# Altium PCB PCB.PcbDoc
Units mil, origin at the board's own origin, x right, y up, seen from the top; angles counter-clockwise.
Board outline 2000 x 2000 mil, 2 copper layers (Top Layer, Bottom Layer); 23 components, 16 nets, 105 pads, 0 vias.
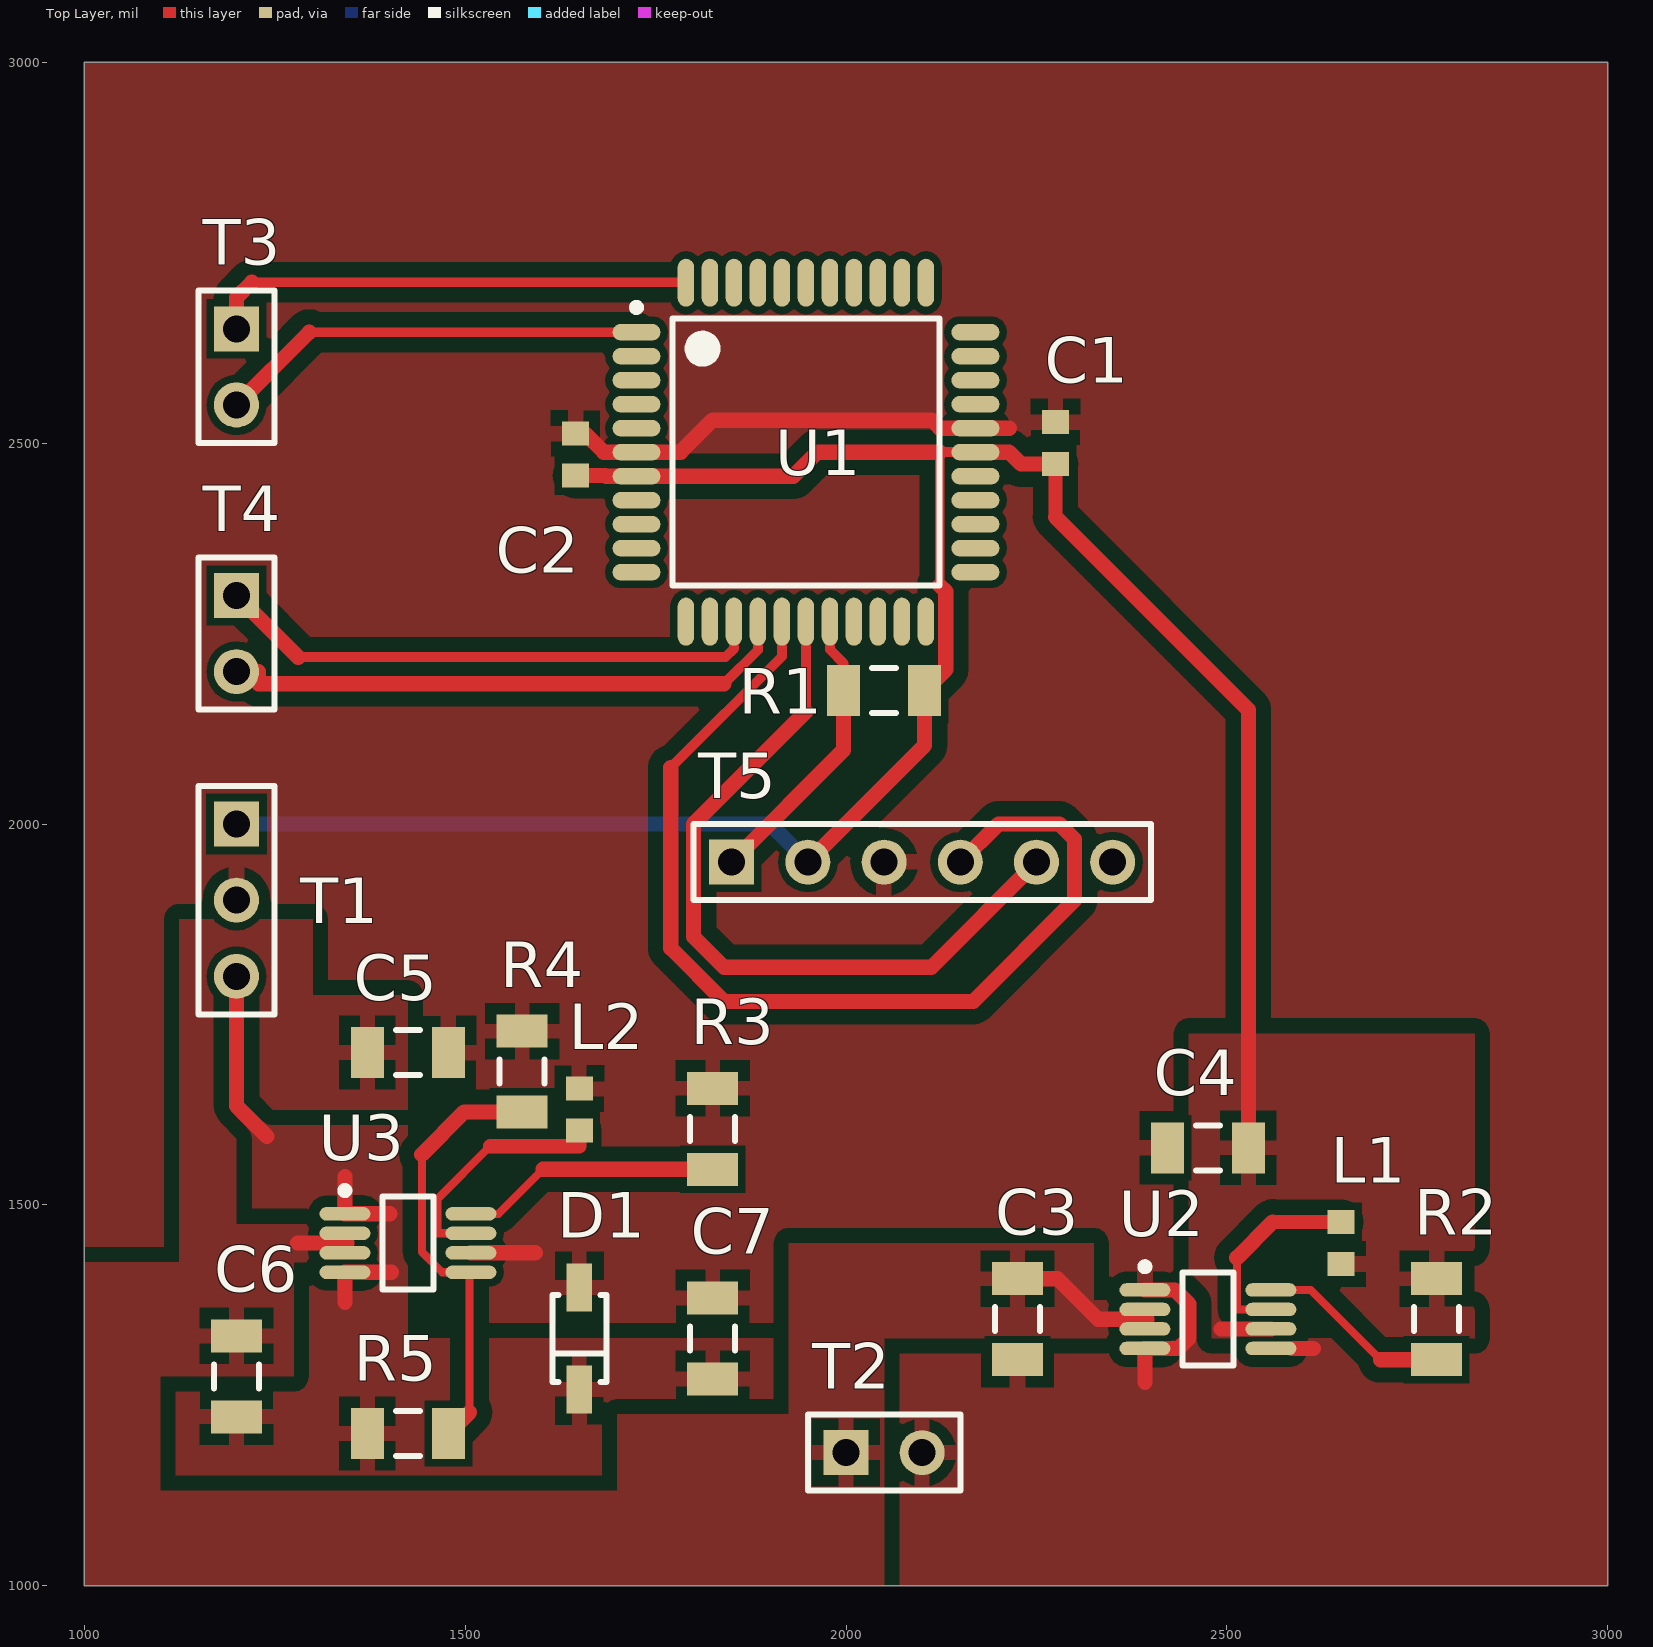
[diagram p0: Top Layer view]
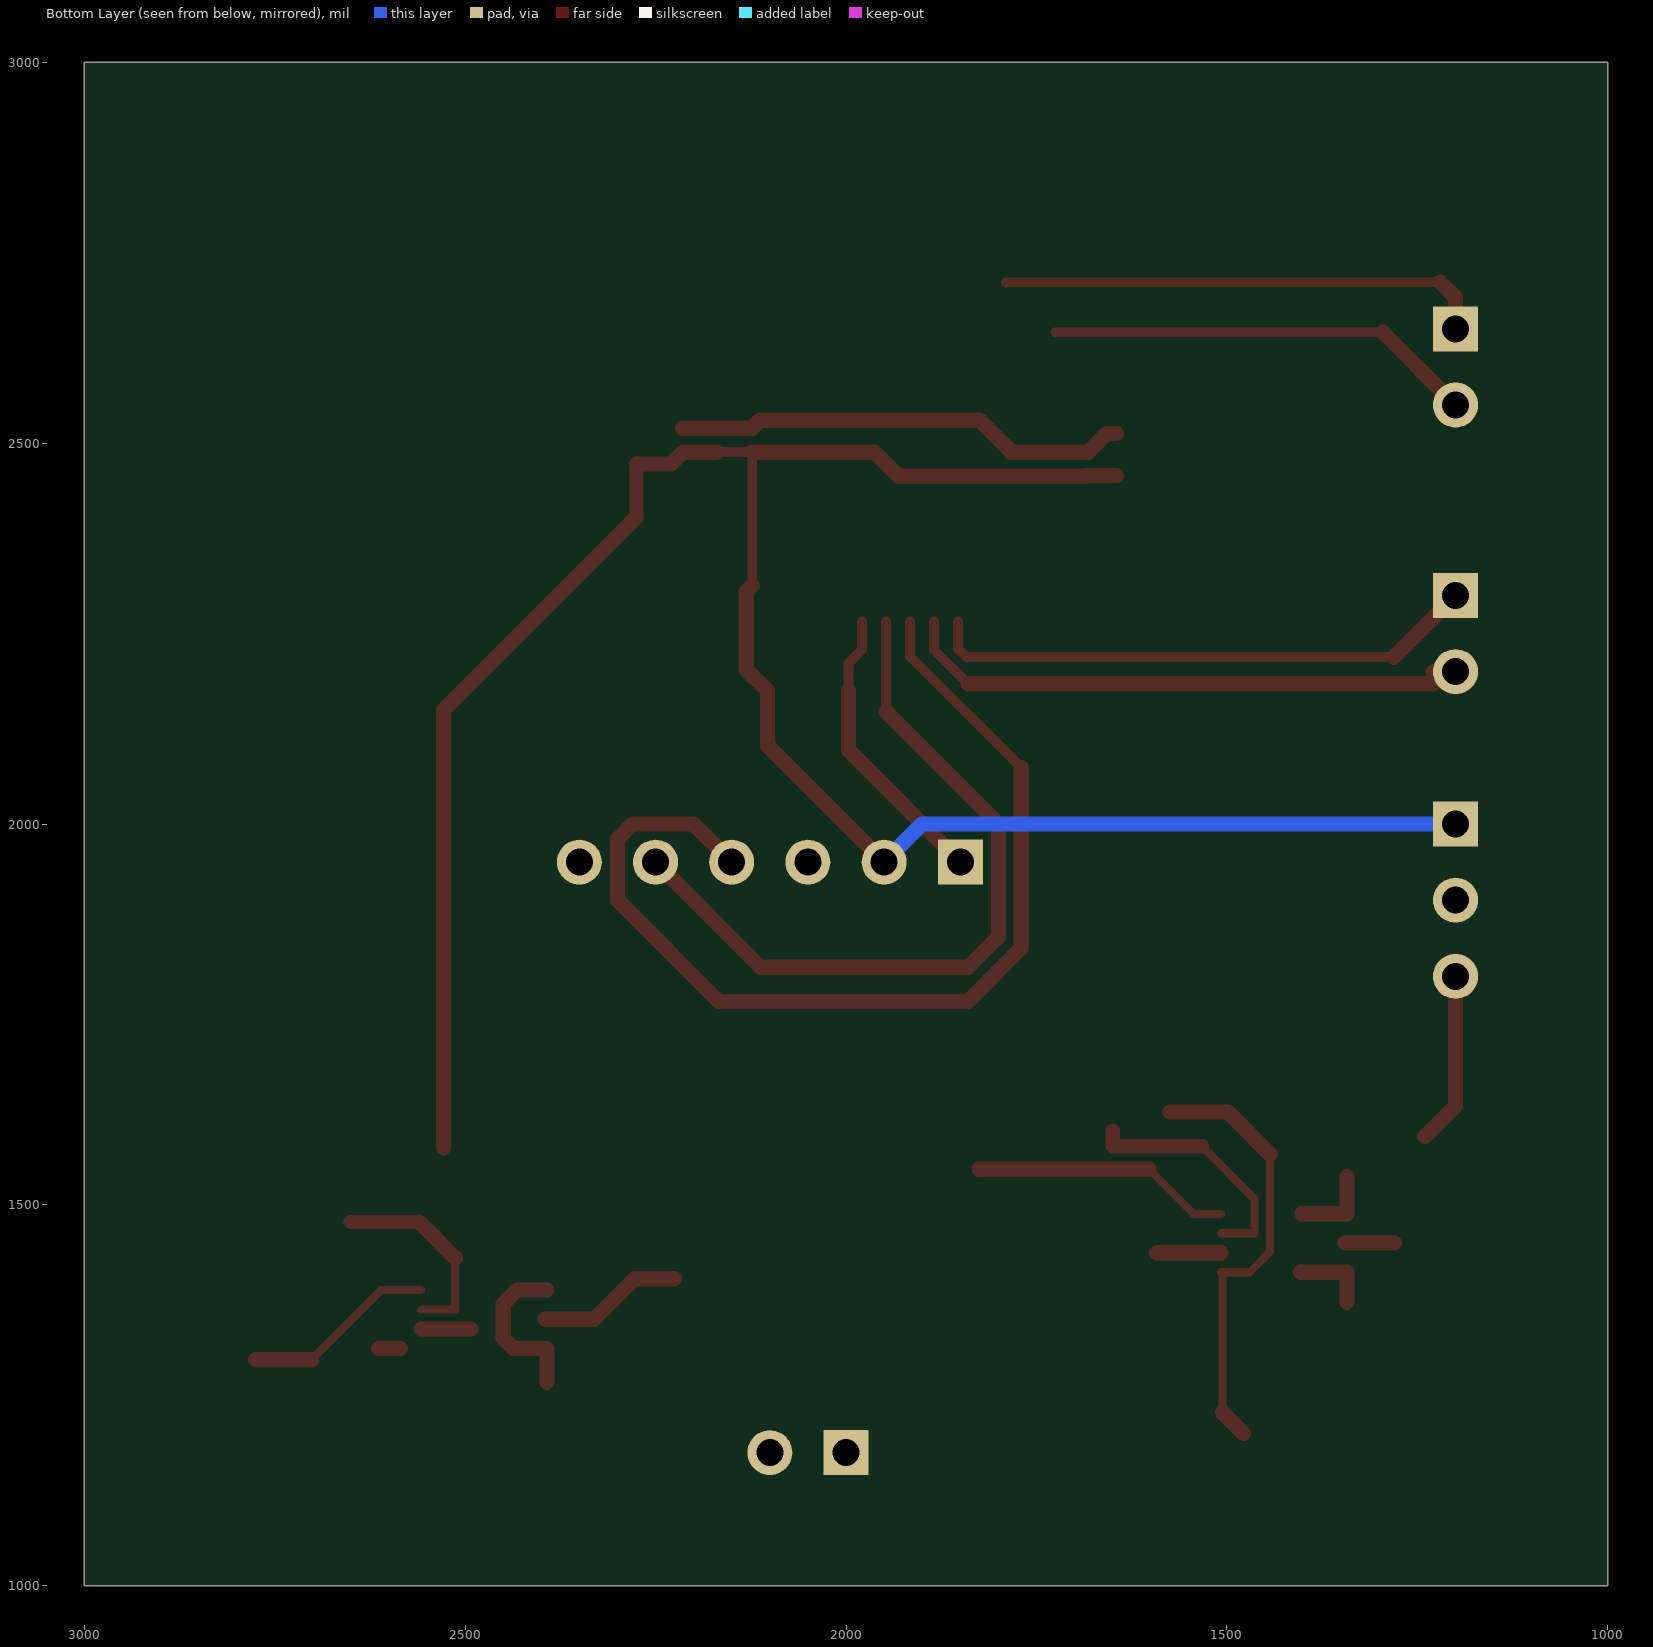
[diagram p1: Bottom Layer view, seen from below]

## Layer stack, top to bottom
Top Solder: solder mask 0.4, Solder Resist, Dk 3.5
Top Layer: signal copper 1.4
Dielectric 1: dielectric 12.6, FR-4, Dk 4.8
Bottom Layer: signal copper 1.4
Bottom Solder: solder mask 0.4, Solder Resist, Dk 3.5

## Board outline
1000,1000 3000,1000 3000,3000 1000,3000

## Design rules (kind name [scope] priority, off if disabled: settings)
Clearance [All] p1: gap=10 except(5: Track-SMDPad SMDPad-SMDPad; 20: Track-Fill Track-Poly Track-Region Fill-Fill Fill-Poly Fill-Region Poly-Poly Poly-Region Region-Region)
MinimumSolderMaskSliver [All] p1: minsoldermaskwidth=0
PlaneConnect [All] p1: planeconnectstyle=Relief reliefexpansion=20 reliefentries=4 reliefconductorwidth=20 reliefairgap=20
PolygonConnect [All] p1: connectstyle=Relief reliefconductorwidth=20 reliefentries=4 polygonreliefangle="90 Angle" airgapwidth=15
RoomDefinition U_Digital [InComponentClass('U_Digital')] p1: confinementstyle=ConfineIn formatcopy=TRUE lockcomponents=FALSE outline 1575,2100 2350,2100 2350,2800 1575,2800
RoomDefinition Power [InComponentClass('Power')] p2: confinementstyle=ConfineOut formatcopy=TRUE lockcomponents=FALSE outline 2500,2500 3000,2500 3000,3000 2500,3000
RoomDefinition Pos [InComponentClass('Pos')] p3: confinementstyle=ConfineIn formatcopy=TRUE lockcomponents=FALSE outline 2175,1250 2875,1250 2875,1725 2175,1725
RoomDefinition Neg [InComponentClass('Neg')] p4: confinementstyle=ConfineIn formatcopy=TRUE lockcomponents=FALSE outline 1125,1125 2075,1125 2075,1850 1125,1850
RoutingVias [All] p1: holewidth=28 width=50 viastyle="Through Hole" minholewidth=28 minwidth=50 maxholewidth=28 maxwidth=50
SMDNeckDown [All] p1: percent=120.000
SilkToSilkClearance [All] p1: silktosilkclearance=5
SilkToSolderMaskClearance [IsPad] p1: minsilkscreentomaskgap=2 clearancetoexposedcopper=TRUE
SolderMaskExpansion [All] p1: expansion=4
Width [All] p1: maxlimit=20 minlimit=10 preferedwidth=20
26 further rules are at their usual default settings.

## Classes and differential pairs
net class DI[1..2]: DI1 DI2
component class U_Digital: C1 C2 R1 U1
component class Power: T1 T2 T3 T4 T5
component class Pos: C3 C4 L1 R2 U2
component class Neg: C5 C6 C7 D1 L2 R3 R4 R5 U3

## Components (designator, comment, footprint, x,y, rotation, side; value= is the part's Value field where it differs from the comment)
C1 "Cap" 1608[0603] 2275,2500 r270 top
C2 "Cap" 1608[0603] 1645,2485 r270 top
C3 "Cap" C1206 2225,1350 r90 top
C4 "Cap" C1206 2475,1575 r0 top
C5 "Cap" C1206 1425,1700 r0 top
C6 "Cap" C1206 1200,1275 r90 top
C7 "Cap" C1206 1825,1325 r90 top
D1 "D Schottky" 425 1650,1325 r90 top
L1 "Inductor" 1608[0603] 2650,1450 r270 top
L2 "Inductor" 1608[0603] 1650,1625 r90 top
R1 "Res1" C1206 2050,2175 r180 top
R2 "Res1" C1206 2775,1350 r90 top
R3 "Res1" C1206 1825,1600 r90 top
R4 "Res1" C1206 1575,1675 r90 top
R5 "Res1" C1206 1425,1200 r180 top
T1 "Do" HDR1X3 1200,2000 r270 top
T2 "9V" HDR1X2 2000,1175 r0 top
T3 "Dout" HDR1X2 1200,2650 r270 top
T4 "Din" HDR1X2 1200,2300 r270 top
T5 "PICkit" HDR1X6 1850,1950 r0 top
U1 "PIC18F46K22-I/PT" MCHP-TQFP-PT44_N 1947.44,2487.99 r0 top
U2 "TPS62160DGKR" DGK8_N 2475,1350 r0 top
U3 "TPS62160DGKR" DGK8_N 1425,1450 r0 top

## Footprints (in the part's own frame and the unit in brackets; to place one, negate y for a bottom-side part, rotate by r counter-clockwise, add the part's x,y. Pads: shape width x height; smd on the part's side, far side on the other; paste and mask are expansions set on the pad)
425 [mm] "SOD-123; 2 Leads; Body 2.7 x 1.6 mm, (LxW)"
  rect 1.6x0.85 smd: 1(-1.7,0) 2(1.7,0)
  silkscreen extent -1.45,-0.9 1.45,0.9
1608[0603] [mm] "Chip Capacitor, Body 1.6x0.8mm, IPC High Density"
  rect 0.8x0.9 smd: 1(-0.7,0) 2(0.7,0)
  body extent -0.87,-0.48 0.87,0.48, height 1.3
C1206 [mm] "Chip Capacitor, Body 3.2x1.6mm, IPC High Density"
  rect 1.1x1.7 smd: 1(-1.35,0) 2(1.35,0)
  silkscreen extent -0.4,-0.75 0.4,0.75, body extent -1.7,-0.9 1.7,0.9, height 1.3
DGK8_N [mm] "TSOP, 8-Leads, Body 3x3mm, Pitch 0.65mm, IPC Medium Density"
  oval 1.7x0.45 smd: 1(-2.1,0.975) 2(-2.1,0.325) 3(-2.1,-0.325) 4(-2.1,-0.975) 5(2.1,-0.975) 6(2.1,-0.325) 7(2.1,0.325) 8(2.1,0.975)
  silkscreen extent -2.22,-1.55 0.85,1.87, body extent -1.55,-1.55 1.55,1.55, height 1.1
HDR1X2 [mm] "Connector; Header; 2 Position"
  rect 1.5x1.5 hole 0.9: 1(0,0)
  round 1.5 hole 0.9: 2(2.54,0)
  silkscreen extent -1.27,-1.27 3.81,1.27
HDR1X3 [mm] "Connector; Header; 3 Position"
  rect 1.5x1.5 hole 0.9: 1(0,0)
  round 1.5 hole 0.9: 2(2.54,0) 3(5.08,0)
  silkscreen extent -1.27,-1.27 6.35,1.27
HDR1X6 [mm] "Connector; Header; 6 Position"
  rect 1.5x1.5 hole 0.9: 1(0,0)
  round 1.5 hole 0.9: 2(2.54,0) 3(5.08,0) 4(7.62,0) 5(10.16,0) 6(12.7,0)
  silkscreen extent -1.27,-1.27 13.97,1.27
MCHP-TQFP-PT44_N [mm] "QFN, 44-Leads, Body 10x10mm, Pitch 0.8mm, IPC Medium Density"
  oval 1.6x0.55 smd: 1(-5.65,4) 2(-5.65,3.2) 3(-5.65,2.4) 4(-5.65,1.6) 5(-5.65,0.8) 6(-5.65,0) 7(-5.65,-0.8) 8(-5.65,-1.6) 9(-5.65,-2.4) 10(-5.65,-3.2) 11(-5.65,-4) 23(5.65,-4) 24(5.65,-3.2) 25(5.65,-2.4) 26(5.65,-1.6) 27(5.65,-0.8) 28(5.65,0) 29(5.65,0.8) 30(5.65,1.6) 31(5.65,2.4) 32(5.65,3.2) 33(5.65,4)
  oval 0.55x1.6 smd: 12(-4,-5.65) 13(-3.2,-5.65) 14(-2.4,-5.65) 15(-1.6,-5.65) 16(-0.8,-5.65) 17(0,-5.65) 18(0.8,-5.65) 19(1.6,-5.65) 20(2.4,-5.65) 21(3.2,-5.65) 22(4,-5.65) 34(4,5.65) 35(3.2,5.65) 36(2.4,5.65) 37(1.6,5.65) 38(0.8,5.65) 39(0,5.65) 40(-0.8,5.65) 41(-1.6,5.65) 42(-2.4,5.65) 43(-3.2,5.65) 44(-4,5.65)
  silkscreen extent -5.77,-4.45 4.45,4.95, body extent -5,-5 5,5, height 1.2

## Part data
C1 C2 C3 C4 C5 C6 C7: "Capacitor"
D1: "Schottky Diode"
R1 R2 R3 R4 R5: "Resistor"
T1: library part "Header 3", "Header, 3-Pin"
T2 T3 T4: library part "Header 2", "Header, 2-Pin"
T5: library part "Header 6", "Header, 6-Pin"
U1: "Low-Power, High-Performance Microcontroller with XLP Technology, 64 MHz, 35 I/O, -40 to 85 degC, 44-pin TQFP (PT44), Tray"
U2 U3: "Buck Step Down Regulator with 3 to 17 V Input and 0.9 to 6 V Output, -40 to 85 degC, 8-Pin VSSOP (DGK), Green (RoHS & no Sb/Br)"

## Nets (pads, with @x,y where several pads share a name; then routed paths per layer and width w, separated by ;. In a path a pad name is that pad's centre, name@x,y a point inside that pad or via, vN(x,y) a via of type N, cw(c..) or ccw(c..) an arc to the next point about the centre after c; other vN are vias at no path point)
9V: C3.2 C5.1 C6.2 T2.1 U2.2 U2.3 U3.2 U3.3 | length 257
  Top Layer w20: 1280,1450 1345,1450 ; C3.2 2277.44,1403.15 2330.59,1350 2395,1350
DI1: T4.1 U1.14 | length 726.6
  Top Layer w12.99: 1281,2219 1841.95,2219 1852.95,2230 U1.14
  Top Layer w20: T4.1 1281,2219
DI2: T4.2 U1.15 | length 756
  Top Layer w12.99: 1840,2184 1884.45,2228.45 U1.15
  Top Layer w20: T4.2 1229,2200 1229,2184 1840,2184
GND: C1.1 C2.1 C3.1 C4.1 C5.2 C7.2 D1.2 L2.2 R3.2 R4.2 T1.2 T2.2 T5.3 U1.6 U1.29 U2.1 U2.4 U2.5 U3.6 | length 932.1
  Top Layer w20: U3.6 1592.2,1437.2 ; C2.1 1657.44,2512.56 1682.01,2487.99 U1.6 1782.99,2487.99 1825,2530 2112.65,2530 2123.16,2519.49 U1.29 2214.49,2519.49 ; 2392.32,1267.32 U2.4 2436.61,1311.61 2450,1325 2450,1370 2431.61,1388.39 U2.1 ; U2.5@2585,1311.61 2613.39,1311.61
MCLR: R1.2 T5.1 U1.18 | length 383.8
  Top Layer w12.99: U1.18 1978.94,2228.91 1996.85,2211 R1.2
  Top Layer w20: T5.1 1996.85,2096.85 R1.2
NetL1_1: L1.1 U2.7 | length 268.9
  Top Layer w10.63: 2513,1430.56 2513,1362.8 U2.7
  Top Layer w18.9: 2560,1477.56 L1.1
  Top Layer w20: 2513,1430.56 2560,1477.56
NetL2_1: L2.1 U3.7 | length 324.1
  Top Layer w10.63: U3.7 1463.9,1462.8 1463.9,1508 1532.9,1577
  Top Layer w18.9: 1532.9,1577 1650,1577 L2.1
NetR2_1: R2.1 U2.8 | length 255.2
  Top Layer w10.63: U2.8 2610,1388.39 2701.54,1296.85
  Top Layer w20: 2701.54,1296.85 R2.1
NetR3_1: R3.1 U3.8 | length 341.5
  Top Layer w10.63: U3.8 1544,1488.39 1602.46,1546.85
  Top Layer w20: 1602.46,1546.85 R3.1
NetR4_1: R4.1 R5.1 U3.5 | length 581.3
  Top Layer w10.63: 1443.27,1566.27 1443.27,1438.35 1470,1411.61 U3.5@1506,1411.61 ; 1506,1227.85 U3.5@1506,1411.61 ; U3.5 U3.5@1506,1411.61
  Top Layer w20: 1443.27,1566.27 1498.85,1621.85 R4.1 ; R5.1 1506,1227.85
NetT3_1: T3.1 U1.44 | length 639.8
  Top Layer w12.99: 1220,2711 1789.96,2711 U1.44
  Top Layer w20: T3.1 1200,2691 1220,2711
NetT3_2: T3.2 U1.1 | length 564.5
  Top Layer w12.99: 1295.47,2645.47 U1.1
  Top Layer w20: T3.2 1295.47,2645.47
NetT5_4: T5.4 U1.16 | length 1362.1
  Top Layer w12.99: 1770,2074 1915.94,2219.94 U1.16
  Top Layer w20: 1770,2074 1770,1837 1840,1767 2167,1767 2300,1900 2300,1980 2280,2000 2200,2000 T5.4
NetT5_5: T5.5 U1.17 | length 998.4
  Top Layer w12.99: 1947.44,2147.44 U1.17
  Top Layer w20: 1947.44,2147.44 1800,2000 1800,1852 1840,1812 2112,1812 T5.5
VDD: C1.2 C2.2 C4.2 L1.2 R1.1 R2.2 T1.1 T5.2 U1.7 U1.28 U2.6 | length 3104.6
  Top Layer w12.99: 2123,2313 2123,2487.99 U1.28
  Top Layer w18.9: 2275,2403 C1.2
  Top Layer w20: C2.2 1684,2457.44 1684.94,2456.5 U1.7 1931,2456.5 1962.5,2487.99 2123,2487.99 ; T5.2 2103.15,2103.15 R1.1 2131,2202.85 2131,2305 2123,2313 ; U1.28 2214,2487.99 2229.55,2472.44 C1.2 ; 2275,2403 2528.15,2149.85 C4.2 ; 2492.2,1337.2 U2.6
  Bottom Layer w20: T1.1 1900,2000 T5.2
VSS: C6.1 C7.1 D1.1 R5.2 T1.3 U3.1 U3.4 | length 435.2
  Top Layer w20: T1.3 1200,1630 1240,1590 ; 1342.32,1372.32 U3.4 1403.39,1411.61 ; 1342.32,1537.32 U3.1 1401.61,1488.39
pads on no net: T5.6 U1.2 U1.3 U1.4 U1.5 U1.8 U1.9 U1.10 U1.11 U1.12 U1.13 U1.19 U1.20 U1.21 U1.22 U1.23 U1.24 U1.25 U1.26 U1.27 U1.30 U1.31 U1.32 U1.33 U1.34 U1.35 U1.36 U1.37 U1.38 U1.39 U1.40 U1.41 U1.42 U1.43

## Polygon pours and split planes (outlines as drawn)
GND on Top Layer "GND_L01_P008" (solid, remove dead copper, pour order 8): 1000,3000 3000,3000 3000,1000 2050,1000 2050,1325 2825,1325 2825,1725 2450,1725 2450,1375 2325,1375 2325,1450 1925,1450 1925,1325 1425,1325 1425,1775 1300,1775 1300,1875 1125,1875 1125,1425 1000,1425
VSS on Top Layer "VSS_L01_P006" (solid, remove dead copper, pour order 6): 1100,1275 1275,1275 1275,1425 1375,1425 1375,1475 1200,1475 1200,1625 1425,1625 1425,1325 1925,1325 1925,1225 1914.53,1214.53 1700,1214.53 1700,1125 1100,1125
VDD on Top Layer "VDD_L01_P004" (solid, remove dead copper, pour order 4): 2450,1725 2450,1325 2825,1325 2825,1725
9V on Top Layer "9V_L01_P002" (solid, remove dead copper, pour order 2): 2050,1125 2050,1325 2450,1325 2450,1375 2325,1375 2325,1450 1925,1450 1925,1375 1925,1225 1700,1225 1700,1125 1100,1125 1100,1275 1275,1275 1275,1425 1425,1425 1425,1475 1200,1475 1200,1625 1425,1625 1425,1775 1300,1775 1300,1875 1125,1875 1125,1425 1000,1425 1000,1000 2050,1000